# Altium PCB Floppytron.PcbDoc
Units mm, origin at the board's own origin, x right, y up, seen from the top; angles counter-clockwise.
Board outline 44.83 x 32.77 mm, 2 copper layers (Top Layer, Bottom Layer); 8 components, 9 nets, 64 pads, 0 vias.
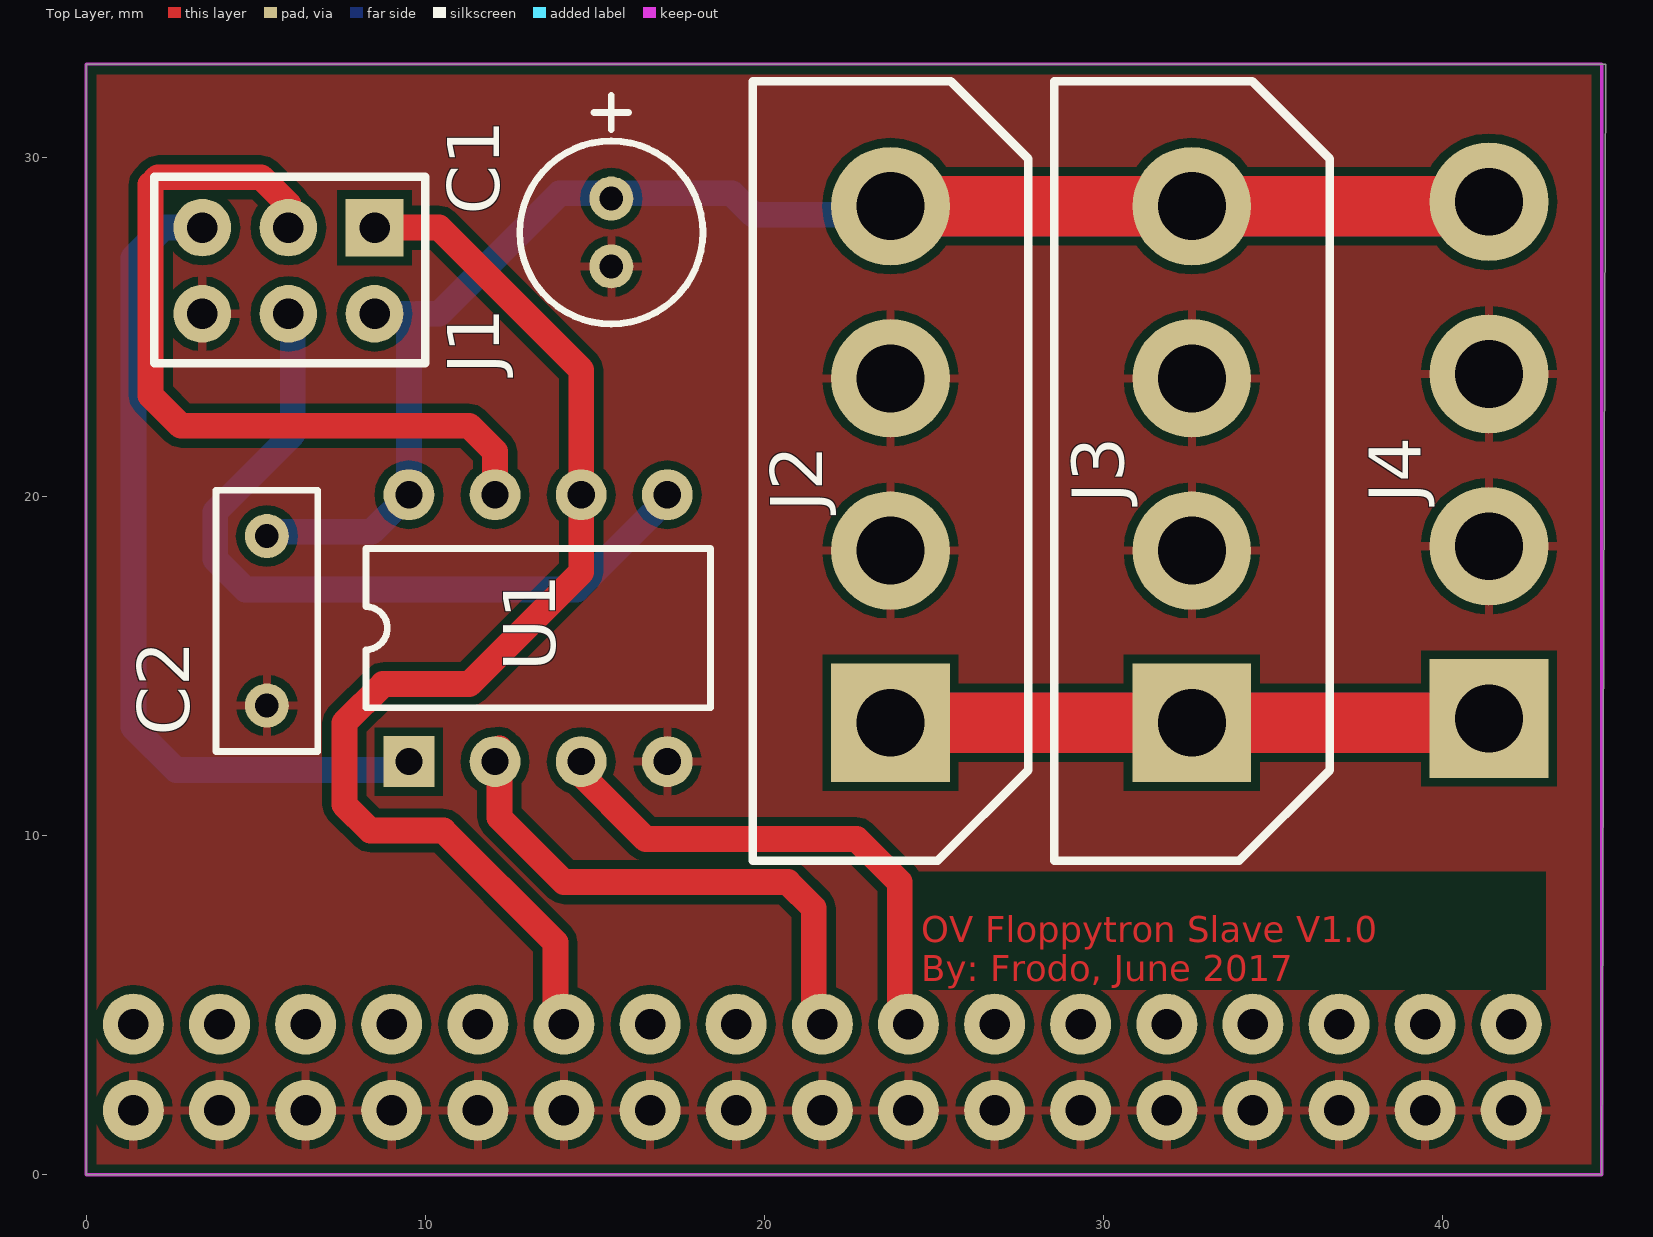
[diagram p0: Top Layer view]
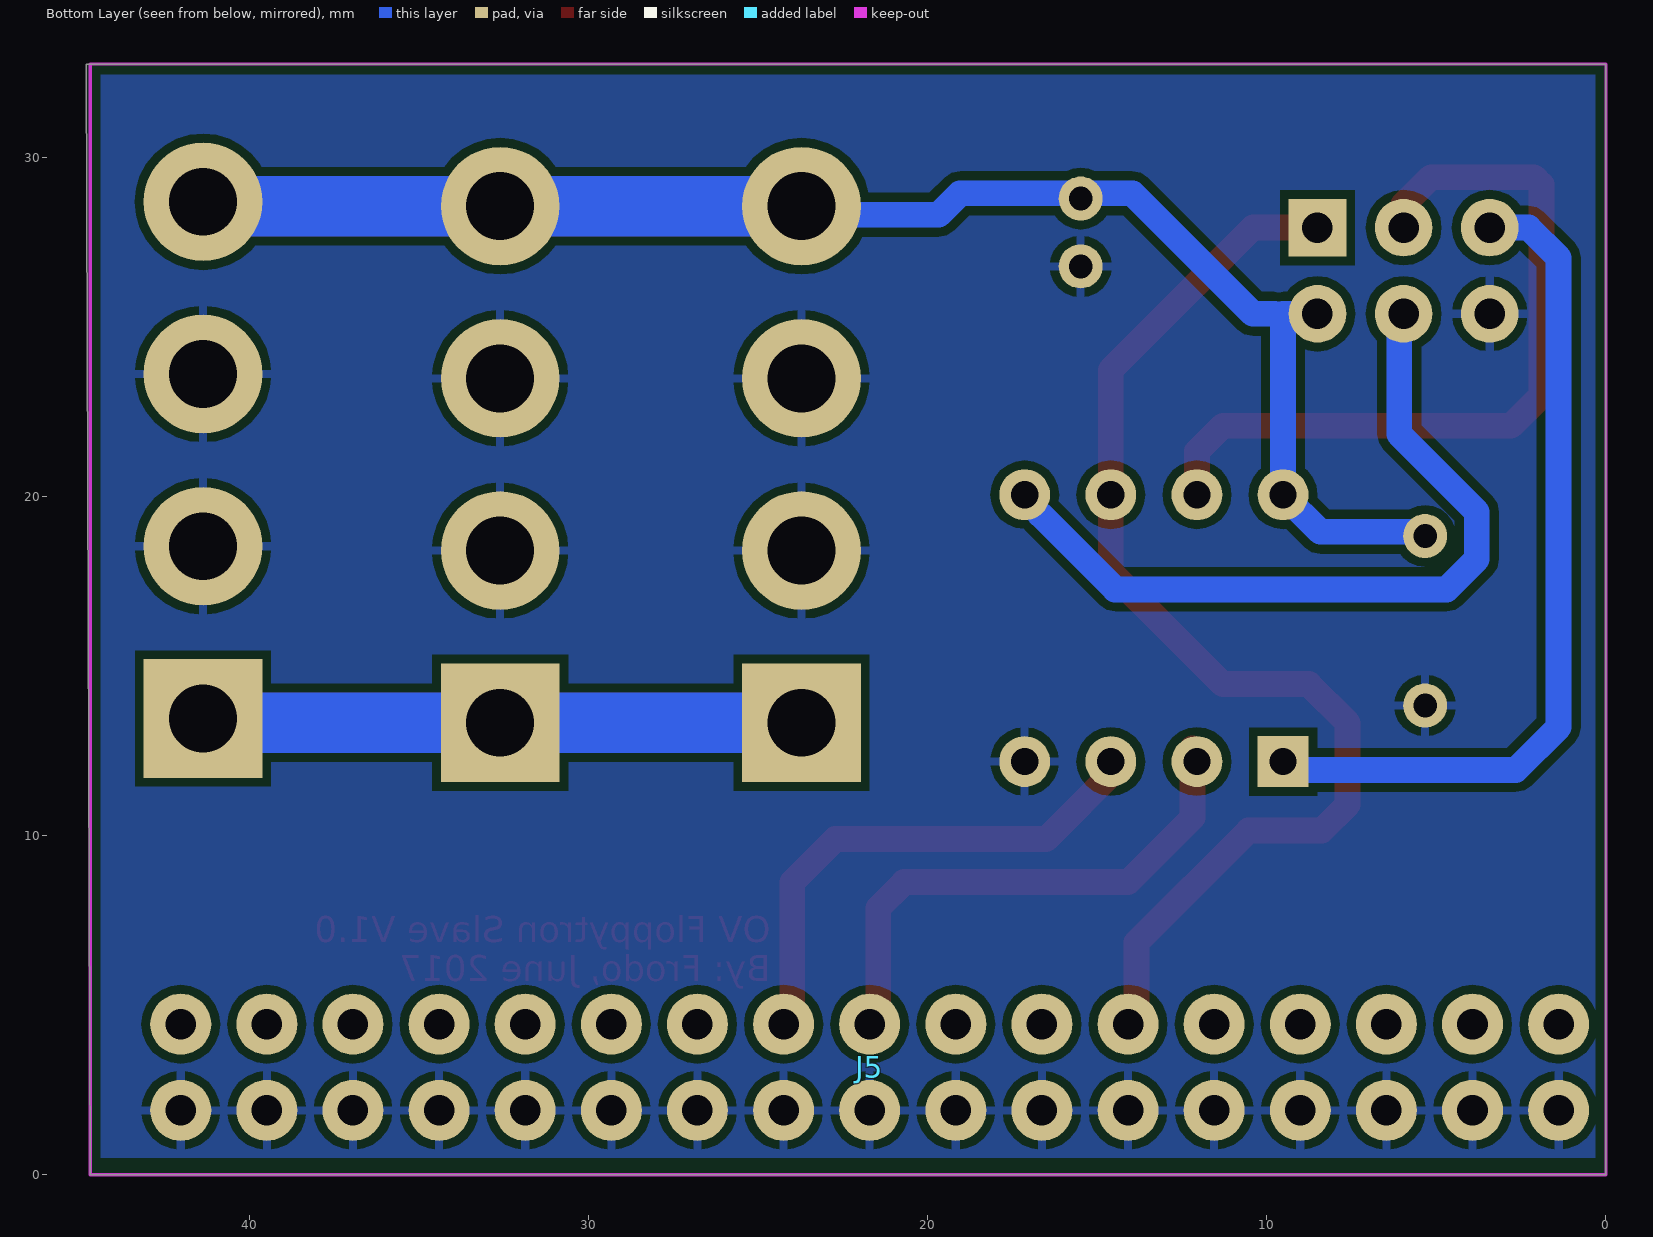
[diagram p1: Bottom Layer view, seen from below]
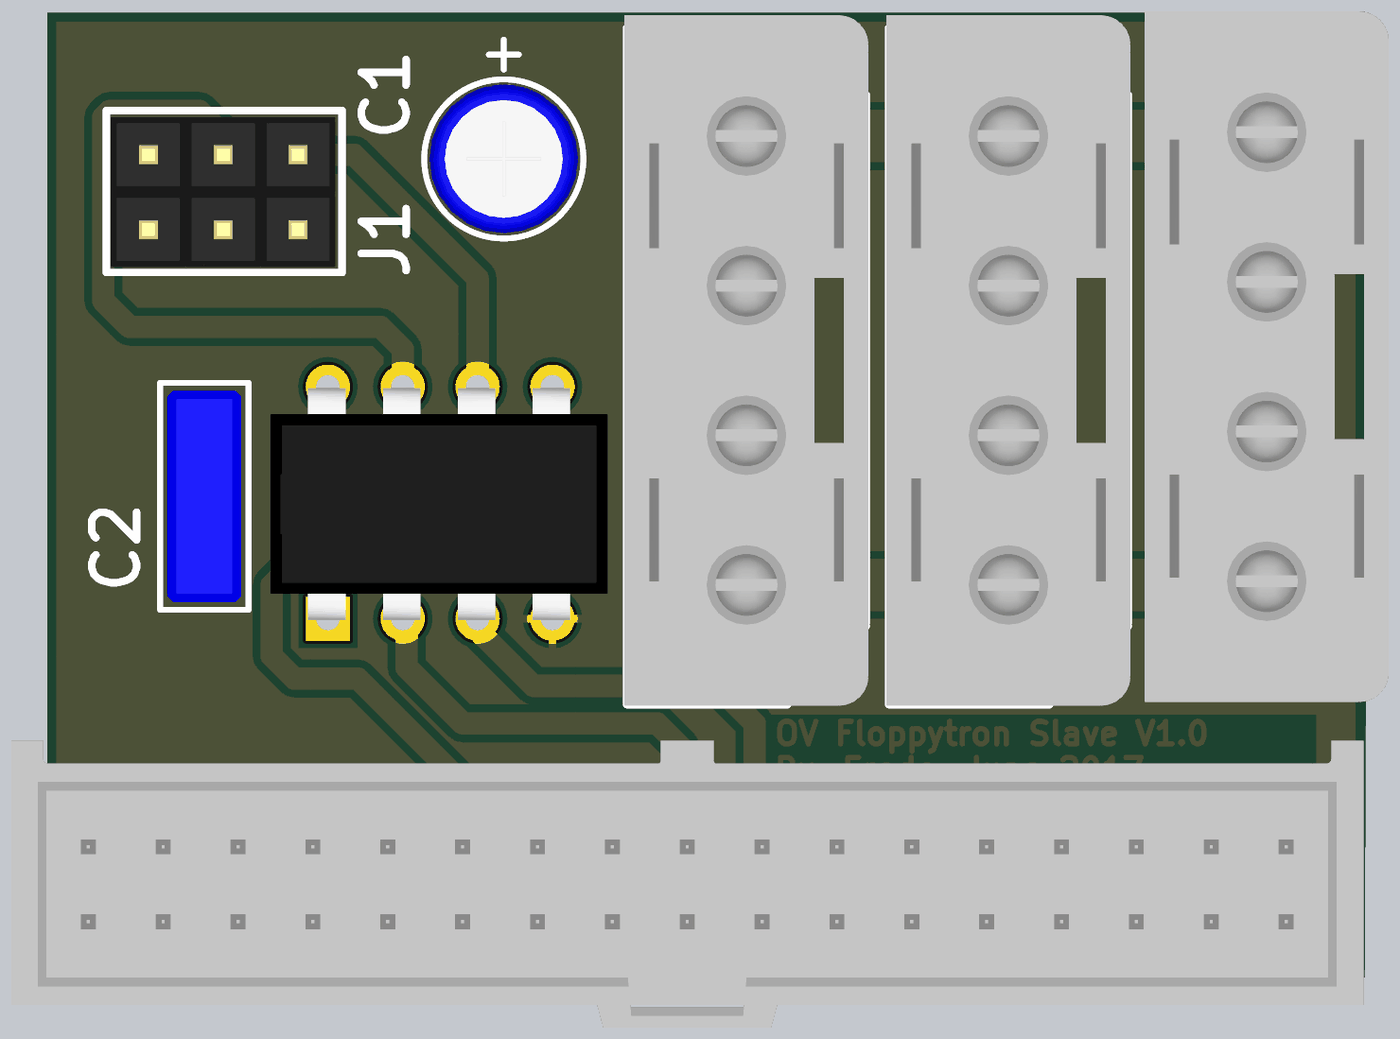
[diagram p2: 3D render of the assembled board from above, using the file's embedded part models]

## Layer stack, top to bottom
Top Solder: solder mask 0.0102, Solder Resist, Dk 3.5
Top Layer: signal copper 0.0356
Dielectric 1: dielectric 0.32, FR-4, Dk 4.8
Bottom Layer: signal copper 0.0356
Bottom Solder: solder mask 0.0102, Solder Resist, Dk 3.5

## Board outline
0,0 44.704,0 44.831,32.766 33.782,32.766 0,32.766

## Design rules (kind name [scope] priority, off if disabled: settings)
Clearance [All] p1: gap=0.254
PolygonConnect [All] p1: connectstyle=Relief reliefconductorwidth=0.254 reliefentries=4 polygonreliefangle="90 Angle" airgapwidth=0.254
RoutingVias [All] p1: holewidth=0.711 width=1.27 viastyle="Through Hole" minholewidth=0.711 minwidth=1.27 maxholewidth=0.711 maxwidth=1.27
SolderMaskExpansion [All] p1: expansion=0.102
Width [All] p1: maxlimit=2.54 minlimit=0.254 preferedwidth=0.508
30 further rules are at their usual default settings.

## Components (designator, comment, footprint, x,y, rotation, side; value= is the part's Value field where it differs from the comment)
C1 "47uF" CAPPR20D05H11 15.494,26.797 r90 top
C2 "100nF" CAPAR500W50L730T250H650 5.334,18.843 r270 top
J1 "AVR_SPI_HDR_6P" HEADER_3x2 8.509,27.94 r180 top
J2 "PWR?" MOLEX_4-PIN_DISK_PWR_MALE_PCB 23.727,13.335 r90 top
J3 "PWR?" MOLEX_4-PIN_DISK_PWR_MALE_PCB 32.617,13.335 r90 top
J4 "PWR?" MOLEX_4-PIN_DISK_PWR_MALE_PCB 41.38,13.462 r90 top
J5 "2X17PConnector" HDRV34W64P254_2X17_5070X900X900B 21.717,3.175 r90 bottom
U1 "ATTiny85" DIP8 9.525,12.192 r90 top

## Footprints (in the part's own frame and the unit in brackets; to place one, negate y for a bottom-side part, rotate by r counter-clockwise, add the part's x,y. Pads: shape width x height; smd on the part's side, far side on the other; paste and mask are expansions set on the pad)
CAPAR500W50L730T250H650 [mm] "Lead Spacing=5.0mm, Lead Width=0.5mm, Body Length=7.3mm, Body thickness=2.5mm, Body Height=6.5mm"
  round 1.3 hole 0.7: 1(0,0) 2(5,0)
  silkscreen extent -1.35,-1.5 6.35,1.5, body extent -1.1,-1.25 6.1,1.25, height 6.5
CAPPR20D05H11 [mm] "D=5mm, Pitch=2.0mm, H=11mm"
  round 1.3 hole 0.7: 1(0,0) 2(2,0)
  silkscreen extent -1.7,-2.7 5.05,2.7, body extent -1.53,-2.53 3.53,2.53, height 11.53
DIP8 [mm]
  rect 1.5x1.5 hole 0.8: 1(0,0)
  round 1.5 hole 0.8: 2(0,-2.54) 3(0,-5.08) 4(0,-7.62) 5(7.87,-7.62) 6(7.87,-5.08) 7(7.87,-2.54) 8(7.87,0)
  silkscreen extent 1.58,-8.89 6.29,1.27, body extent -0.05,-9.49 7.83,1.94, height 4.19
HDRV34W64P254_2X17_5070X900X900B [mm] "IDE-connector"
  round 1.8 hole 0.9: 1(-1.27,-20.32) 2(1.27,-20.32) 3(-1.27,-17.78) 4(1.27,-17.78) 5(-1.27,-15.24) 6(1.27,-15.24) 7(-1.27,-12.7) 8(1.27,-12.7) 9(-1.27,-10.16) 10(1.27,-10.16) 11(-1.27,-7.62) 12(1.27,-7.62) 13(-1.27,-5.08) 14(1.27,-5.08) 15(-1.27,-2.54) 16(1.27,-2.54) 17(-1.27,0) 18(1.27,0) 19(-1.27,2.54) 20(1.27,2.54) 21(-1.27,5.08) 22(1.27,5.08) 23(-1.27,7.62) 24(1.27,7.62) 25(-1.27,10.16) 26(1.27,10.16) 27(-1.27,12.7) 28(1.27,12.7) 29(-1.27,15.24) 30(1.27,15.24) 31(-1.27,17.78) 32(1.27,17.78) 33(-1.27,20.32) 34(1.27,20.32)
  body extent -4.87,-22.95 4.88,22.95, height 10.45
HEADER_3x2 [mm]
  rect 1.7x1.7 hole 0.9: 1(0,0)
  round 1.7 hole 0.9: 2(0,2.54) 3(2.54,0) 4(2.54,2.54) 5(5.08,0) 6(5.08,2.54)
  silkscreen extent -1.5,-1.5 6.5,4, body extent -1.27,-1.27 6.35,3.81, height 8.45
MOLEX_4-PIN_DISK_PWR_MALE_PCB [mm] "4-pin standard Molex power connector (12V/5V), male for PCB mount - without align pin"
  rect 3.5x3.5 hole 2: 1(0,0)
  round 3.5 hole 2: 2(5.08,0) 3(10.16,0) 4(15.24,0)
  silkscreen extent -4.06,-4.06 18.92,4.06, body extent -4.1,-4.14 19.34,4.14, height 10.27

## Part data
C1: library part 3296, "25V, Elektrolytt"
C2: library part 3269, "100V plast"
J1: library part 3052, "6-pins ISP header for AVR"
J2 J3 J4: library part 2330, "4Pin PC power connector"
J5: library part 2390

## Nets (pads, with @x,y where several pads share a name; then routed paths per layer and width w, separated by ;. In a path a pad name is that pad's centre, name@x,y a point inside that pad or via, vN(x,y) a via of type N, cw(c..) or ccw(c..) an arc to the next point about the centre after c; other vN are vias at no path point)
GND: C1.1 C2.2 J1.6 J2.2 J2.3 J3.2 J3.3 J4.2 J4.3 J5.1 J5.3 J5.5 J5.7 J5.9 J5.11 J5.13 J5.15 J5.17 J5.19 J5.21 J5.23 J5.25 J5.27 J5.29 J5.31 J5.33 U1.4
NetJ1_1: J1.1 J5.12 U1.6 | length 35.4
  Top Layer w0.762: J1.1 10.414,27.94 14.605,23.749 U1.6 14.605,17.78 11.303,14.478 8.763,14.478 7.62,13.335 7.62,10.922 8.382,10.16 10.541,10.16 13.843,6.858 J5.12@13.843,4.445
NetJ1_3: J1.3 U1.7 | length 23.5
  Top Layer w0.762: J1.3 5.969,28.624 5.168,29.425 2.12,29.425 1.905,29.21 1.905,22.987 2.794,22.098 11.303,22.098 12.065,21.336 U1.7
NetJ1_4: J1.4 U1.5 | length 22.2
  Bottom Layer w0.762: J1.4@6.096,25.273 6.096,21.844 3.81,19.558 3.81,18.161 4.699,17.272 14.478,17.272 U1.5@16.689,19.483
NetJ1_5: J1.5 U1.1 | length 24.4
  Bottom Layer w0.762: J1.5 2.286,27.94 1.397,27.051 1.397,13.208 2.663,11.942 U1.1@9.017,11.942
NetJ2_1: J2.1 J3.1 J4.1 | length 35.4
  Top Layer w0.762: J4.1@41.253,13.335 J4.1
  Top Layer w1.778: J2.1 J3.1 J4.1@41.253,13.335
  Bottom Layer w0.762: J4.1@41.253,13.335 J4.1
  Bottom Layer w1.778: J2.1 J3.1 J4.1@41.253,13.335
NetJ5_18: J5.18 U1.2 | length 15.3
  Top Layer w0.762: U1.2@12.192,12.573 12.192,10.541 14.097,8.636 20.701,8.636 21.463,7.874 J5.18@21.463,4.953
NetJ5_20: J5.20 U1.3 | length 14.7
  Top Layer w0.762: U1.3@14.414,12.002 16.51,9.906 22.733,9.906 24.003,8.636 J5.20@24.003,4.953
VCC: C1.2 C2.1 J1.2 J2.4 J3.4 J4.4 U1.8 | length 63.2
  Top Layer w0.762: J4.4@41.253,28.575 J4.4
  Top Layer w1.778: J2.4 J3.4 J4.4@41.253,28.575
  Bottom Layer w0.762: C2.1@5.334,18.97 8.429,18.97 9.525,20.066 9.525,25.4 J1.2@8.741,25.4 ; J1.2 J1.2@8.741,25.4 ; J1.2@8.741,25.527 J1.2@8.741,25.4 ; 9.779,25.4 10.414,25.4 13.97,28.956 19.05,28.956 19.685,28.321 J2.4@23.981,28.321 ; J2.4 J2.4@23.981,28.321 ; J2.4@24.246,28.056 J2.4@23.981,28.321 ; J4.4@41.253,28.575 J4.4
  Bottom Layer w1.778: J2.4 J3.4 J4.4@41.253,28.575
pads on no net: J5.2 J5.4 J5.6 J5.8 J5.10 J5.14 J5.16 J5.22 J5.24 J5.26 J5.28 J5.30 J5.32 J5.34

## Polygon pours and split planes (outlines as drawn)
GND on Top Layer "Top Layer GND" (solid, remove dead copper, pour order 0): 0.127,32.639 44.704,32.639 44.704,0 0.127,0.127 0.127,-1.397
GND on Bottom Layer "Bottom layer GND" (solid, remove dead copper, pour order 2): 0,0.508 44.704,0.508 44.704,32.766 0,32.766

## Keep-outs
Keep-Out Layer:
  lines w0.1: 0,0 44.704,0 44.704,32.766 0,32.766 0,0

## Other copper
Top Layer:
  text "OV Floppytron Slave V1.0 / By: Frodo, June 2017" at 24.638,5.715 h0.76